# EAGLE board ASCEND_SP_23 (EAGLE 9.6.2)
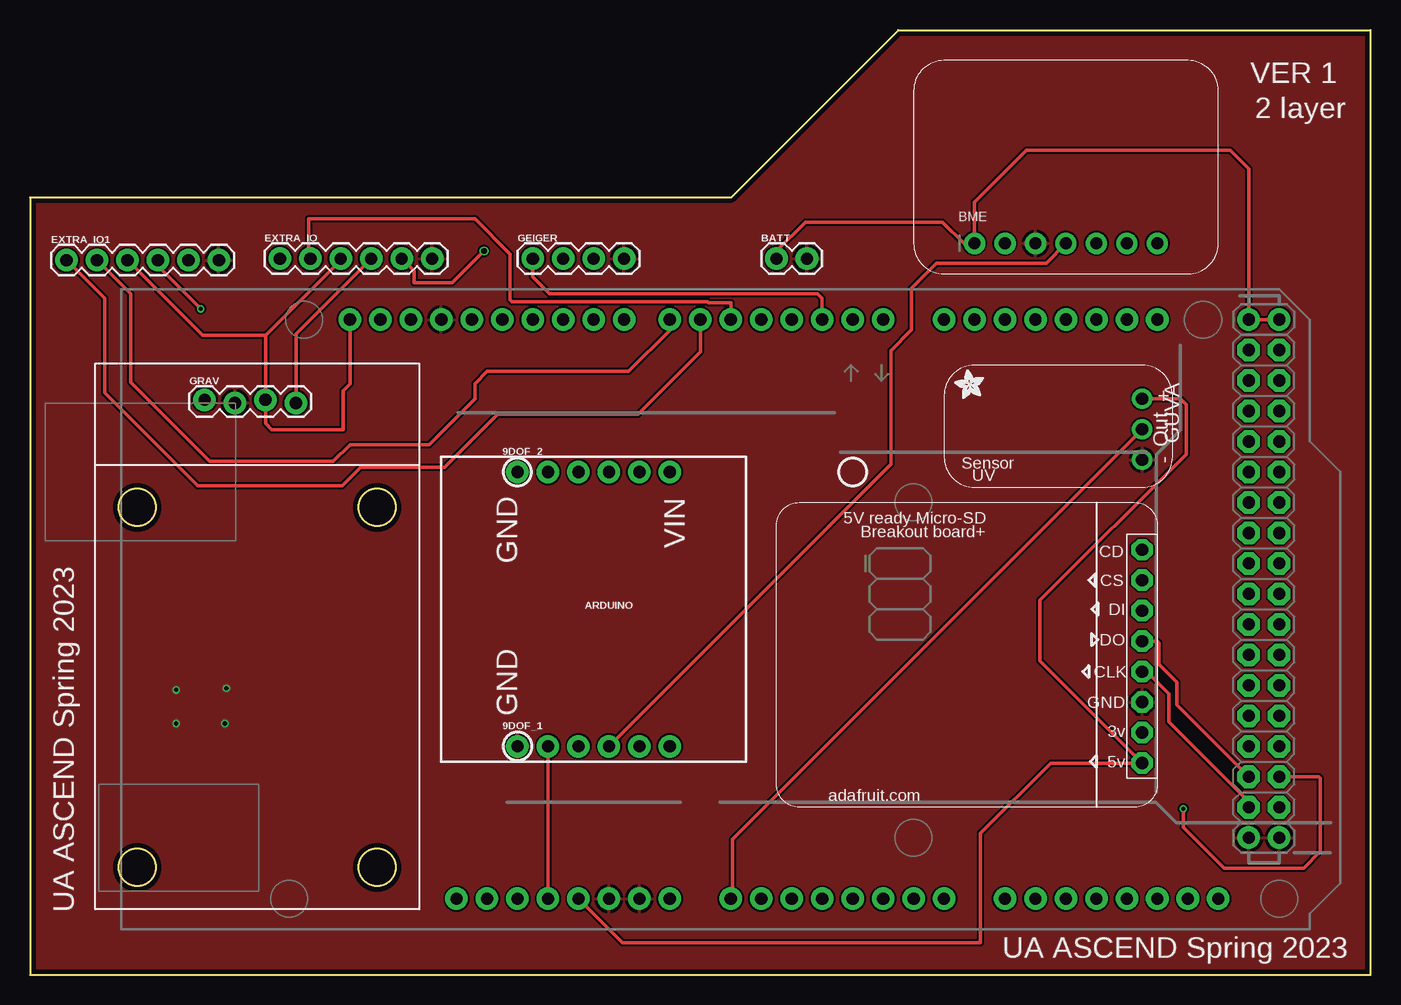
[diagram p0: board, top side]
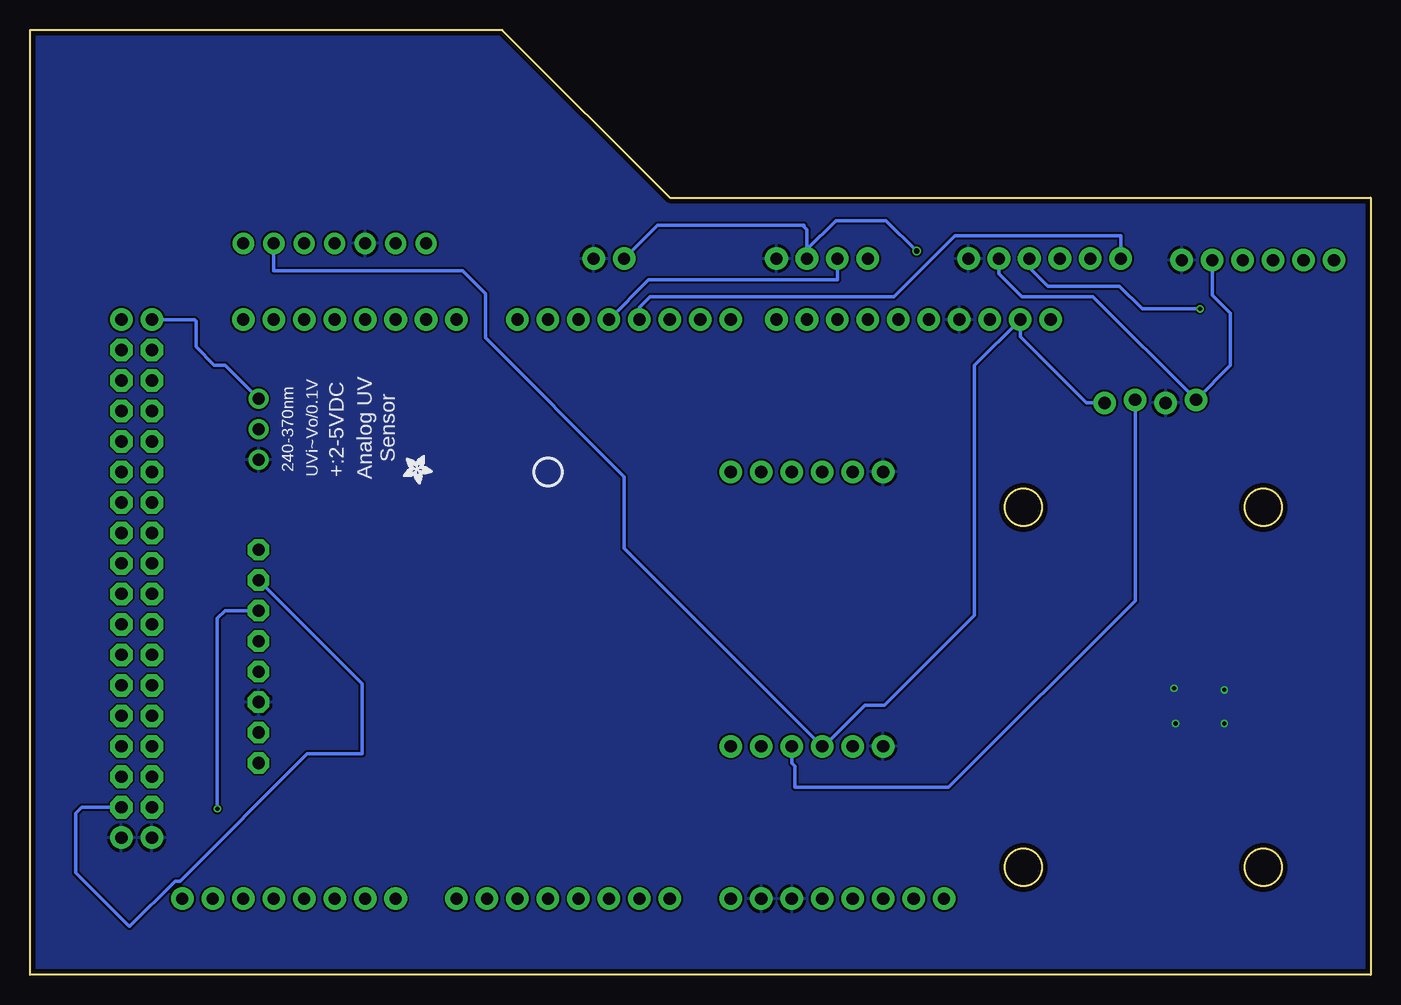
[diagram p1: board, bottom side, seen from below]

Size 111.76 x 78.74 mm. Coordinates in mm from the lower left corner, seen from the top.
Outline: 72.39,78.74 111.76,78.74 111.76,0 0,0 0,64.77 58.42,64.77 72.39,78.74
Outline: circle at 8.95,38.95 radius 1.55
Outline: circle at 8.95,8.95 radius 1.55
Outline: circle at 28.95,38.95 radius 1.55
Outline: circle at 28.95,8.95 radius 1.55
Copper layers (1*16): Top 0.035559375mm / dielectric 1.6mm / Bottom 0.035559375mm
Design rules "DRC": minimum track width 6mil, minimum drill 10mil, track to track 6mil, track to pad 6mil, pad to pad 6mil, via to via 6mil, smd to smd 6mil, copper to edge 15mil, drill to drill 6mil, minimum pad ring 5mil, minimum via ring 5mil, stop-mask expansion 2.5mil, vias tented up to drill 0mil, thermal gap 10mil
Net classes: 1 highpower: width 0.305 mm, drill 0.483 mm; 2 lowpower: width 0.305 mm, drill 0.483 mm; 3 power usb: width 0.508 mm, drill 0.406 mm, clearance 0.203 mm

## Footprints (pad centres in the part's own frame; a part is rotated, then mirrored left to right if it is on the bottom)
1X06_NO_SILK = drill 1.016 pad 1.88: 1 0,0; 2 2.54,0; 3 5.08,0; 4 7.62,0; 5 10.16,0; 6 12.7,0
ARDUINO_MEGA_NO_SILK = drill 1.016 pad 1.88: 0 13.97,24.13; 1 11.43,24.13; 2 8.89,24.13; 3 6.35,24.13; 3.3V -13.97,-24.13; 4 3.81,24.13; 5 1.27,24.13; 5V -11.43,-24.13; 5V@1 44.45,24.13; 5V@2 46.99,24.13; 6 -1.27,24.13; 7 -3.81,24.13; 8 -7.62,24.13; 9 -10.16,24.13; 10 -12.7,24.13; 11 -15.24,24.13; 12 -17.78,24.13; 13 -20.32,24.13; 14 19.05,24.13; 15 21.59,24.13; 16 24.13,24.13; 17 26.67,24.13; 18 29.21,24.13; 19 31.75,24.13; 20 34.29,24.13; 21 36.83,24.13; A0 1.27,-24.13; A1 3.81,-24.13; A2 6.35,-24.13; A3 8.89,-24.13; A4 11.43,-24.13; A5 13.97,-24.13; A6 16.51,-24.13; A7 19.05,-24.13; A8 24.13,-24.13; A9 26.67,-24.13; A10 29.21,-24.13; A11 31.75,-24.13; A12 34.29,-24.13; A13 36.83,-24.13; A14 39.37,-24.13; A15 41.91,-24.13; AREF -25.4,24.13; GND -8.89,-24.13; GND@1 -6.35,-24.13; GND@2 44.45,-19.05; GND@3 46.99,-19.05; GND@4 -22.86,24.13; IOREF -19.05,-24.13; NC -21.59,-24.13; RESET -16.51,-24.13; SCL -30.48,24.13; SDA -27.94,24.13; VIN -3.81,-24.13 | drill 1.016 pad 1.88 octagon: 22 44.45,21.59; 23 46.99,21.59; 24 44.45,19.05; 25 46.99,19.05; 26 44.45,16.51; 27 46.99,16.51; 28 44.45,13.97; 29 46.99,13.97; 30 44.45,11.43; 31 46.99,11.43; 32 44.45,8.89; 33 46.99,8.89; 34 44.45,6.35; 35 46.99,6.35; 36 44.45,3.81; 37 46.99,3.81; 38 44.45,1.27; 39 46.99,1.27; 40 44.45,-1.27; 41 46.99,-1.27; 42 44.45,-3.81; 43 46.99,-3.81; 44 44.45,-6.35; 45 46.99,-6.35; 46 44.45,-8.89; 47 46.99,-8.89; 48 44.45,-11.43; 49 46.99,-11.43; 50 44.45,-13.97; 51 46.99,-13.97; 52 44.45,-16.51; 53 46.99,-16.51
1X02 = drill 1.016 pad 1.88: 1 0,0; 2 2.54,0
1X07_ROUND_70 = drill 1 pad 1.778: 1 -7.62,0; 2 -5.08,0; 3 -2.54,0; 4 0,0; 5 2.54,0; 6 5.08,0; 7 7.62,0
1X06 = drill 1.016 pad 1.88: 1 0,0; 2 2.54,0; 3 5.08,0; 4 7.62,0; 5 10.16,0; 6 12.7,0
1X04 = drill 1.016 pad 1.88: 1 0,0; 2 2.54,0; 3 5.08,0; 4 7.62,0
1X04_LOCK = drill 1.016 pad 1.88: 1 0,0.127; 2 2.54,-0.127; 3 5.08,0.127; 4 7.62,-0.127
1X03-CLEANBIG = drill 1.016 pad 1.676: 1 -2.54,0; 2 0,0; 3 2.54,0
1X08-BIG = drill 1.016 pad 1.778 octagon: 1 -8.89,0; 2 -6.35,0; 3 -3.81,0; 4 -1.27,0; 5 1.27,0; 6 3.81,0; 7 6.35,0; 8 8.89,0

## Placement (x,y rotation side)
9DOF_1  [1X06_NO_SILK]  40.64,19.05 0 top
9DOF_2  [1X06_NO_SILK]  40.64,41.91 0 top
ARDUINO  ARDUINO_MEGA_R3FULL  [ARDUINO_MEGA_NO_SILK]  57.15,30.48 0 top
BATT  [1X02]  62.23,59.69 0 top
BME  [1X07_ROUND_70]  86.36,60.96 0 top
EXTRA_IO  [1X06]  20.83,59.69 0 top
EXTRA_IO1  [1X06]  3.05,59.56 0 top
GEIGER  [1X04]  41.91,59.69 0 top
GRAV  [1X04_LOCK]  14.55,47.79 0 top
GUVA  [1X03-CLEANBIG]  92.71,45.47 270 top
SD_R  [1X08-BIG]  92.71,26.54 90 top
U$15  [ADAFRUIT_2.5MM]  79.5,48.01 90 top
U$16  [ADAFRUIT_2.5MM]  80.64,43.31 270 bottom

## Library data of the parts
9DOF_1 9DOF_2 BATT = SparkFun-Connectors
ARDUINO = SparkFun-Boards
BME U$15 U$16 = microbuilder
EXTRA_IO EXTRA_IO1 = SparkFun-Connectors; PROD_ID: CONN-08437
GEIGER GRAV = SparkFun-Connectors; PROD_ID: CONN-09696
GUVA SD_R = adafruit

## Nets
3V: 9DOF_1.2 ARDUINO.3.3V
5V: ARDUINO.5V ARDUINO.5V@1 ARDUINO.5V@2 BATT.1 BME.1 EXTRA_IO1.5 EXTRA_IO.5 GEIGER.3 GRAV.1 GUVA.1 SD_R.1
CLK: ARDUINO.52 SD_R.4
CS: ARDUINO.53 SD_R.7
D4: ARDUINO.4 EXTRA_IO.1
D5: ARDUINO.5 EXTRA_IO.2
D6: ARDUINO.6 EXTRA_IO1.1
D7: ARDUINO.7 EXTRA_IO1.2
DS: ARDUINO.3 GEIGER.2
GND: 9DOF_1.1 9DOF_2.1 ARDUINO.GND ARDUINO.GND@1 ARDUINO.GND@2 ARDUINO.GND@3 ARDUINO.GND@4 BATT.2 BME.3 EXTRA_IO1.6 EXTRA_IO.6 GEIGER.4 GRAV.2 GUVA.3 SD_R.3
N$1: ARDUINO.A0 GUVA.2
NS: ARDUINO.2 GEIGER.1
SCL: 9DOF_1.4 ARDUINO.SCL BME.4 EXTRA_IO1.3 EXTRA_IO.3 GRAV.3
SDA: 9DOF_1.3 ARDUINO.SDA BME.6 EXTRA_IO1.4 EXTRA_IO.4 GRAV.4
SDI: ARDUINO.51 SD_R.6
SDO: ARDUINO.50 SD_R.5

## Tracks (layer width: path | path; a pad name or v marks a point on that pad's centre or on a via)
3V
  Top 0.305: 9DOF_1.2 ARDUINO.3.3V
5V  (via drill 0.48)
  Top 0.305: ARDUINO.5V 49.4,2.67 79.25,2.67 79.25,11.81 85.09,17.65 SD_R.1 84.2,26.16 84.2,31.21 96.39,43.4 96.39,47.5 95.88,48.01 GUVA.1 | ARDUINO.5V@2 ARDUINO.5V@1 101.6,67.18 100.08,68.71 83.06,68.71 78.74,64.39 BME.1 77.85,60.96 76.07,62.74 64.64,62.74 62.23,60.33 BATT.1 | EXTRA_IO.5 32,58.67 32,57.66 35.18,57.66 v37.85,60.33
  Bottom 0.305: EXTRA_IO.5 30.99,58.42 29.08,56.52 23.15,56.52 GRAV.1 11.68,50.78 11.68,55.12 13.21,56.64 EXTRA_IO1.5 | BATT.1 59.44,62.48 47.24,62.48 47.24,62.36 46.99,62.1 GEIGER.3 46.99,60.45 44.58,62.86 40.39,62.86 v37.85,60.33 | GUVA.1 95.5,50.8 96.39,50.8 97.92,52.32 97.92,54.48 98.04,54.61 ARDUINO.5V@1
CLK
  Top 0.305: SD_R.4 93.09,25.27 94.92,23.44 94.92,21.11 101.6,14.43 ARDUINO.52
CS
  Bottom 0.305: ARDUINO.53 107.44,13.97 107.95,13.46 107.95,8.51 103.5,4.06 103.43,4.06 99.67,7.82 99.24,7.82 88.65,18.42 84.07,18.42 84.07,24.26 SD_R.7
D4
  Bottom 0.305: EXTRA_IO.1 20.83,61.59 34.67,61.59 39.75,56.52 60.07,56.52 60.96,55.63 ARDUINO.4
D5
  Top 0.305: EXTRA_IO.2 23.24,59.82 23.24,62.99 37.08,62.99 40.01,60.07 40.01,56.26 40.18,56.08 56.49,56.08 56.57,56.01 58.42,56.01 ARDUINO.5
D6
  Top 0.305: EXTRA_IO1.1 6.22,56.39 6.22,48.51 13.97,40.77 26.03,40.77 27.56,42.29 34.54,42.29 38.99,46.74 50.67,46.74 55.88,51.94 ARDUINO.6
D7
  Top 0.305: EXTRA_IO1.2 8.38,56.77 8.38,49.4 14.99,42.8 25.27,42.8 26.67,44.2 33.27,44.2 37.08,48.01 37.08,49.28 38.1,50.29 49.91,50.29 53.34,53.72 ARDUINO.7
DS
  Bottom 0.305: GEIGER.2 44.45,57.91 60.2,57.91 ARDUINO.3
GND  (via drill 0.35)
  other vias: 16.38,23.88 16.26,20.96 12.19,23.75 12.19,20.96
  pour Top: 111.76,0 0,0 0,64.77 58.42,64.77 72.39,78.74 111.76,78.74
  pour Bottom: 111.76,-0.13 0,-0.13 0,64.64 58.42,64.64 72.39,78.61 111.76,78.61
N$1
  Top 0.305: ARDUINO.A0 58.55,6.48 58.55,11.3 GUVA.2
NS
  Top 0.305: ARDUINO.2 66.04,56.39 65.66,56.77 43.31,56.77 41.91,58.17 GEIGER.1
SCL
  Top 0.305: EXTRA_IO.3 25.97,59.63 19.63,53.28 | 19.63,53.28 GRAV.3 19.63,45.96 20.16,45.43 26.09,45.43 26.09,48.69 26.67,49.28 ARDUINO.SCL | BME.4 84.71,59.31 75.56,59.31 73.48,57.23 73.48,53.75 71.75,52.02 71.75,42.54 9DOF_1.4 | EXTRA_IO1.3 14.41,53.28 19.63,53.28
  Bottom 0.305: 9DOF_1.4 48.26,17.65 48.01,17.4 48.01,15.62 35.18,15.62 19.63,31.17 GRAV.3
SDA  (via drill 0.35)
  Top 0.305: GRAV.4 22.17,53.41 EXTRA_IO.4 | EXTRA_IO1.4 10.67,59.05 v14.22,55.5
  Bottom 0.305: GRAV.4 23.69,47.66 29.21,53.18 ARDUINO.SDA 33.02,50.8 33.02,29.97 40.51,22.48 42.16,22.48 45.59,19.05 9DOF_1.3 62.23,35.56 62.23,41.53 73.79,53.09 73.79,56.77 75.69,58.67 91.44,58.67 BME.6 | v14.22,55.5 19.05,55.5 20.95,57.4 26.92,57.4 28.45,58.93 EXTRA_IO.4
SDI  (via drill 0.35)
  Top 0.305: ARDUINO.51 107.44,16.51 107.57,16.38 107.57,10.29 106.17,8.89 99.57,8.89 96.14,12.32 v96.14,13.84
  Bottom 0.305: v96.14,13.84 96.14,29.72 95.5,30.35 SD_R.6
SDO
  Top 0.305: ARDUINO.50 95.61,22.5 95.61,24.39 94.11,25.89 94.11,27.69 93.98,27.81 SD_R.5

## Text on the board
tPlace: VER 1 | 2 layer | + | Out | Sensor | - | UV | 5V ready Micro-SD | Breakout board+ | VIN | GND | GND | adafruit.com | UA ASCEND Spring 2023 | UA ASCEND Spring 2023
bPlace: Analog UV / Sensor | +:2-5VDC | UVi~Vo/0.1V | 240-370nm
tNames: CD | CS | DI | DO | CLK | GND | 3v | 5v